# Altium PCB ADS1292R_ECG_Module.PcbDoc
Units mm, origin at the board's own origin, x right, y up, seen from the top; angles counter-clockwise.
Board outline 61 x 33.2 mm, 2 copper layers (Top Layer, Bottom Layer); 73 components, 55 nets, 208 pads, 31 vias.
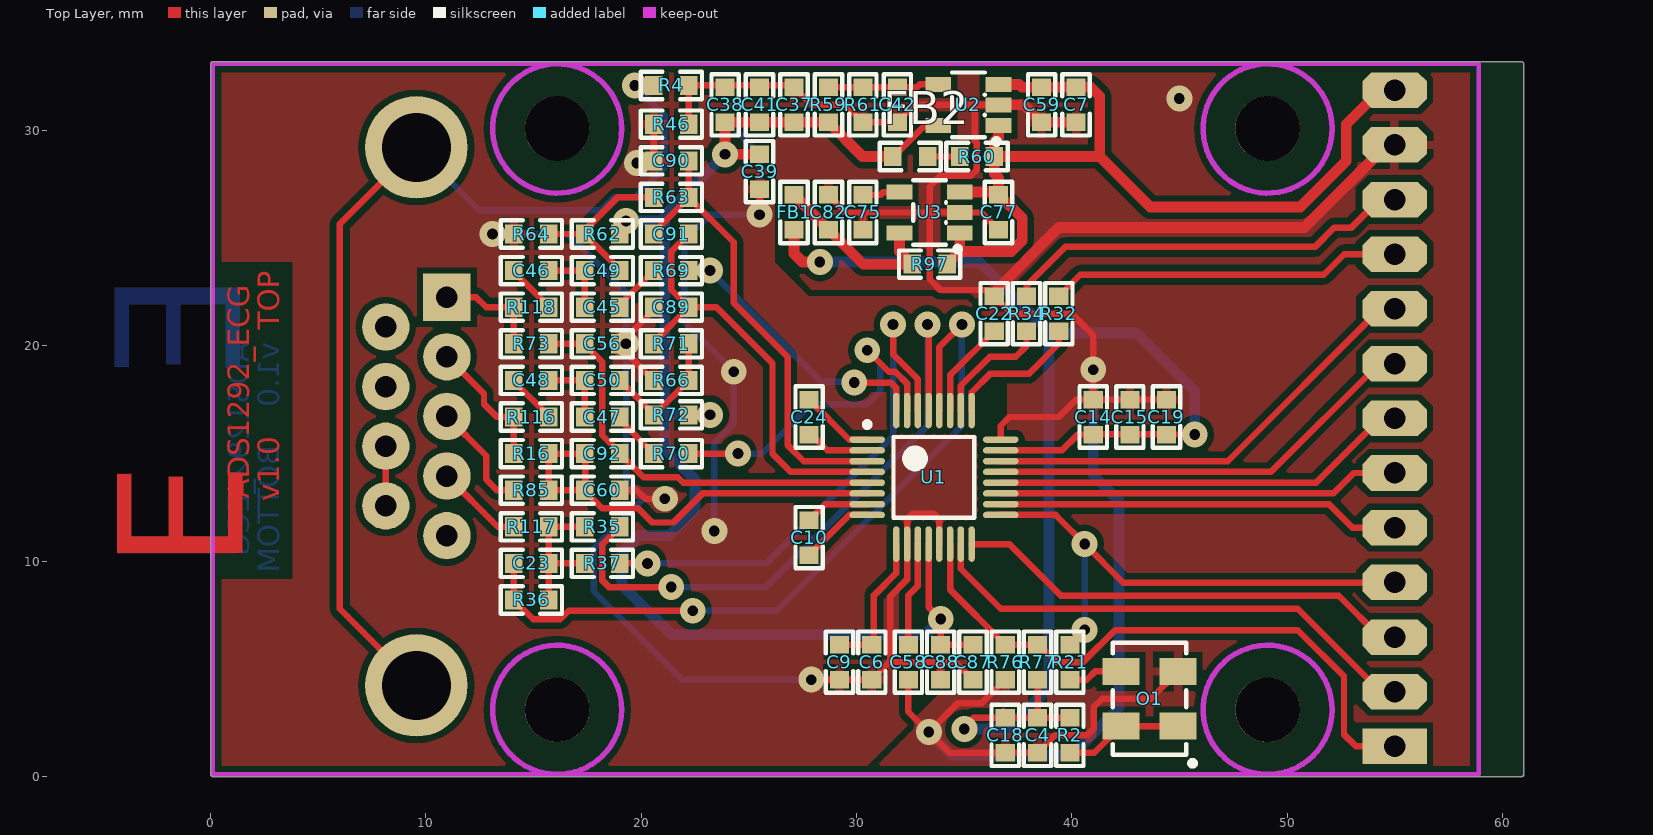
[diagram p0: Top Layer view]
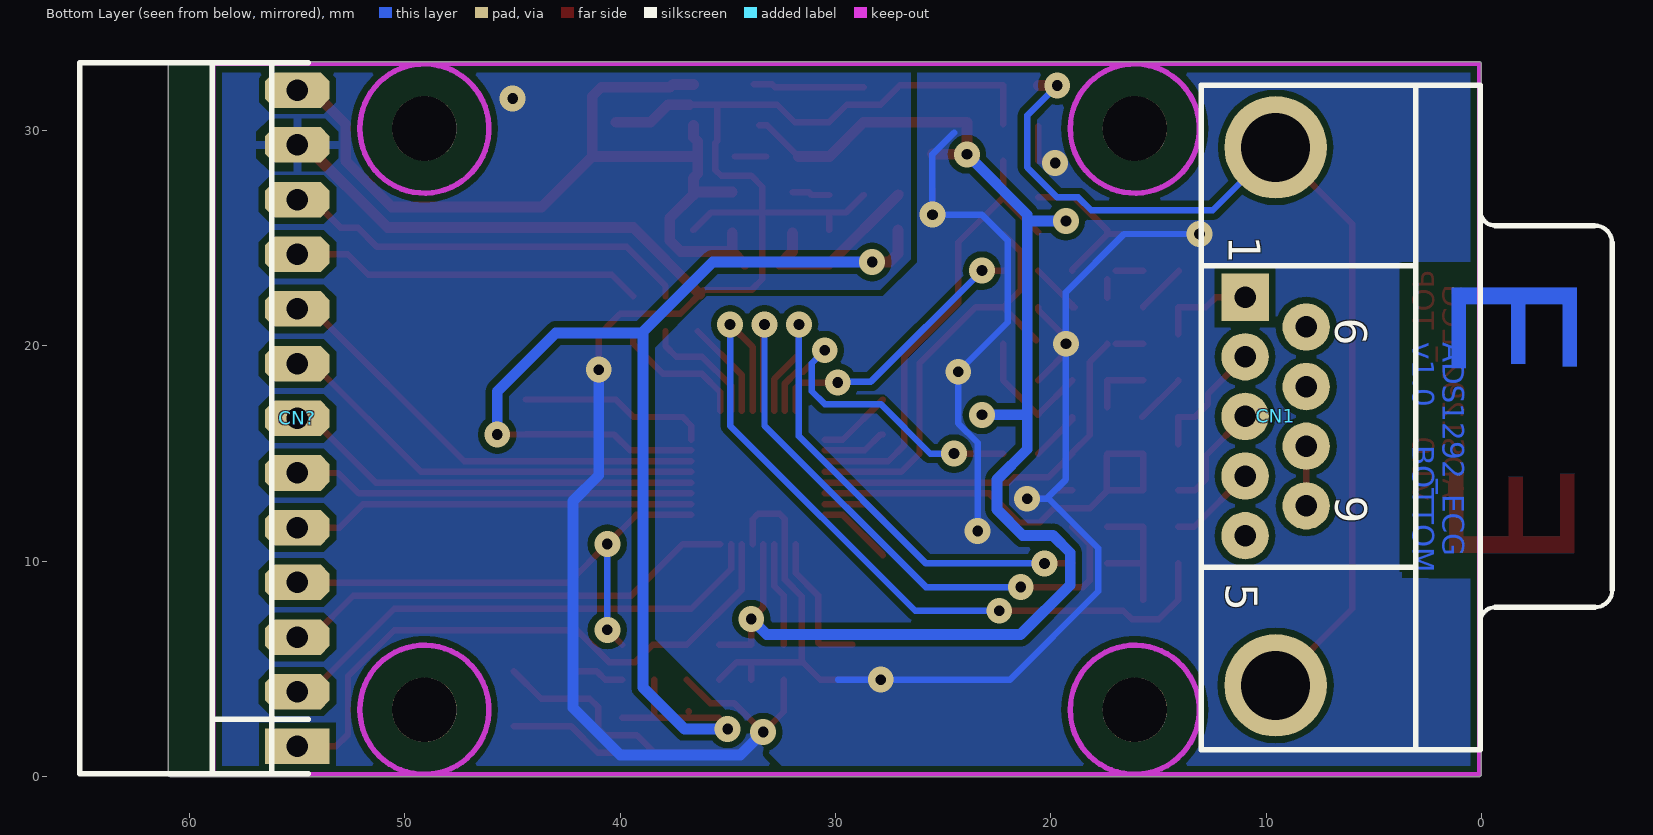
[diagram p1: Bottom Layer view, seen from below]
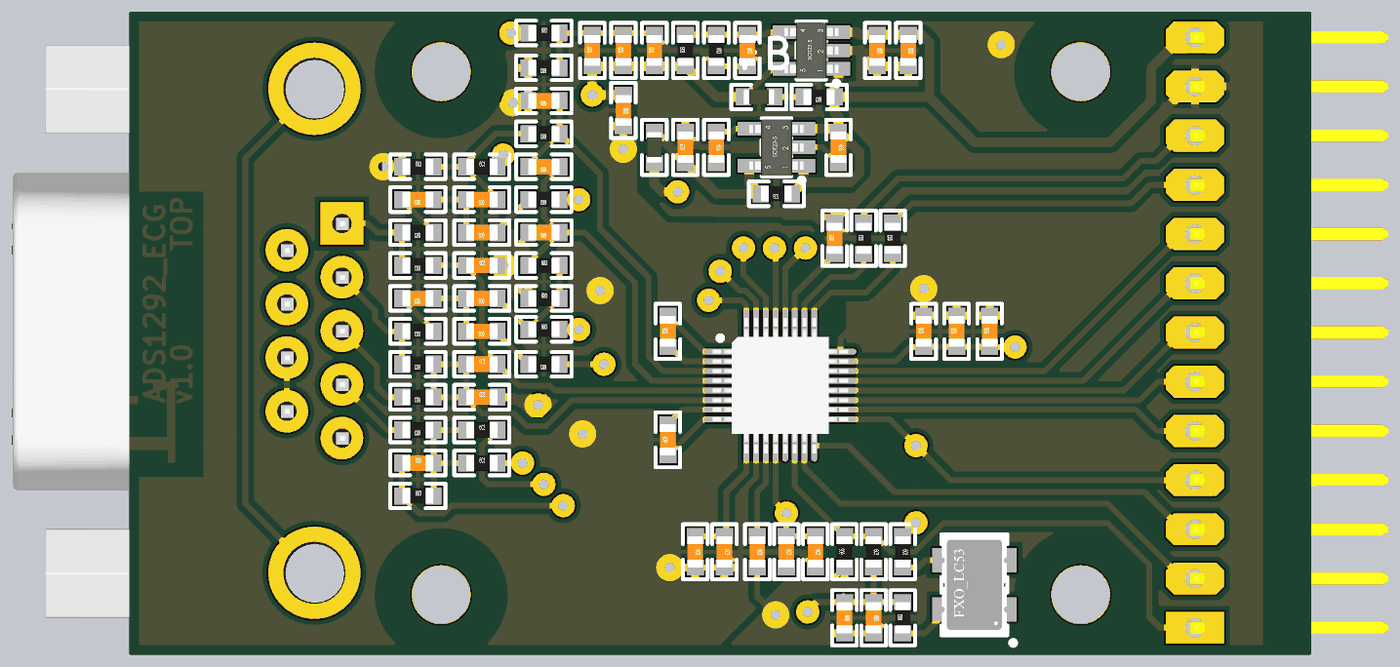
[diagram p2: 3D render of the assembled board from above, using the file's embedded part models]

## Layer stack, top to bottom
Top Solder: solder mask 0.0102, Solder Resist, Dk 3.5
Top Layer: signal copper 0.0356
Dielectric 1: dielectric 0.32, FR-4, Dk 4.8
Bottom Layer: signal copper 0.0356
Bottom Solder: solder mask 0.0102, Solder Resist, Dk 3.5

## Board outline
0.1,0 cw(c0.1,0.1) 0,0.1 0,33.1 cw(c0.1,33.1) 0.1,33.2 60.9,33.2 cw(c60.9,33.1) 61,33.1 61,0.1 cw(c60.9,0.1) 60.9,0

## Design rules (kind name [scope] priority, off if disabled: settings)
Clearance [All] p1: gap=0.3
Clearance Clearance_1 [(InComponent('U2') OR InComponent('U3') OR InComponent('U1'))] p2: gap=0.2
PolygonConnect PolygonConnect_1 [IsVia] p1: connectstyle=Direct reliefconductorwidth=0.4 reliefentries=4 polygonreliefangle="90 Angle" airgapwidth=0.4
PolygonConnect [All] p2: connectstyle=Relief reliefconductorwidth=0.4 reliefentries=4 polygonreliefangle="90 Angle" airgapwidth=0.3
RoomDefinition ADS1292R_ECG_Module [InComponentClass('ADS1292R_ECG_Module')] p1: confinementstyle=ConfineIn formatcopy=TRUE lockcomponents=FALSE outline -8.2,-1.5 67.7,-1.5 67.7,36.2 -8.2,36.2
RoutingVias [All] p1: holewidth=0.5 width=1.2 viastyle="Through Hole" minholewidth=0.5 minwidth=1.2 maxholewidth=0.5 maxwidth=1.2
SilkToSolderMaskClearance [IsPad] p1: minsilkscreentomaskgap=0 clearancetoexposedcopper=TRUE
SolderMaskExpansion [All] p1: expansion=0.102
Width [All] p1: maxlimit=0.5 minlimit=0.3 preferedwidth=0.4
29 further rules are at their usual default settings.

## Components (designator, comment, footprint, x,y, rotation, side; value= is the part's Value field where it differs from the comment)
C4 "---" C0603 38.413,1.913 r270 top
C6 "10uF" C0603 30.713,5.313 r270 top
C7 "10uF" C0603 40.2,31.2 r270 top
C9 "100nF" C0603 29.213,5.313 r270 top
C10 "4,7nF" C0603 27.8,11.1 r90 top
C14 "1uF" C0603 41,16.7 r90 top
C15 "100nF" C0603 42.7,16.7 r90 top
C18 "1uF" C0603 36.913,1.913 r270 top
C19 "100nF" C0603 44.4,16.7 r90 top
C22 "1uF" C0603 36.4,21.502 r90 top
C23 "1,5nF" C0603 14.9,9.9 r0 top
C24 "4,7nF" C0603 27.8,16.7 r90 top
C37 "2,2uF" C0603 27.1,31.2 r90 top
C38 "10uF" C0603 23.9,31.2 r90 top
C39 "100nF" C0603 25.5,28.1 r270 top
C41 "10uF" C0603 25.5,31.2 r90 top
C42 "10nF" C0603 31.9,31.2 r270 top
C45 "2,2nF" C0603 18.2,21.8 r180 top
C46 "100nF" C0603 14.9,23.5 r180 top
C47 "2,2nF" C0603 18.2,16.7 r180 top
C48 "100nF" C0603 14.9,18.4 r180 top
C49 "2,2nF" C0603 18.2,23.5 r180 top
C50 "2,2nF" C0603 18.2,18.4 r180 top
C56 "47pF" C0603 18.2,20.1 r0 top
C58 "1uF" C0603 32.413,5.313 r270 top
C59 "1uF" C0603 38.6,31.2 r270 top
C60 "47pF" C0603 18.2,13.3 r0 top
C75 "10nF" C0603 30.3,26.2 r270 top
C77 "100nF" C0603 36.6,26.2 r270 top
C82 "2,2uF" C0603 28.7,26.2 r90 top
C87 "100nF" C0603 35.413,5.313 r270 top
C88 "1uF" C0603 33.913,5.313 r270 top
C89 "47pF" C0603 21.4,21.8 r180 top
C90 "47pF" C0603 21.4,28.6 r180 top
C91 "---" C0603 21.4,25.2 r180 top
C92 "---" C0603 18.2,15 r0 top
CN1 "Female DB9 Connector" DSUB9H-7,2mm-FEMALE 0.057,16.728 r270 bottom locked
CN? "CN_13x1" GP_13x1H 55,1.4 r90 bottom
FB1 "120R, 2A" FB0603 27.1,26.2 r90 top
FB2 "120R, 2A" FB0603 32.5,28.8 r0 top
O1 "FXO-HC536R-2.048" FXO-HC536R_M 43.613,3.613 r90 top
R2 "---" R0603 39.913,1.913 r90 top
R4 "0R" R0603 21.4,32.1 r0 top
R16 "---" R0603 14.9,15 r180 top
R21 "---" R0603 39.913,5.313 r270 top
R32 "10k" R0603 39.4,21.502 r90 top
R34 "10k" R0603 37.9,21.502 r90 top
R35 "100k" R0603 18.2,11.6 r0 top
R36 "1M" R0603 14.9,8.2 r0 top
R37 "0R" R0603 18.2,9.9 r0 top
R46 "0R" R0603 21.4,30.3 r180 top
R59 "46,4k" R0603 28.7,31.2 r90 top
R60 "0R" R0603 35.6,28.8 r180 top
R61 "30,9k" R0603 30.3,31.2 r270 top
R62 "10M 1%" R0603 18.2,25.2 r0 top
R63 "51k" R0603 21.4,26.9 r180 top
R64 "10M 1%" R0603 14.9,25.2 r0 top
R66 "10M 1%" R0603 21.4,18.4 r0 top
R69 "40k" R0603 21.4,23.5 r180 top
R70 "40k" R0603 21.4,15 r180 top
R71 "51k" R0603 21.4,20.1 r0 top
R72 "10M 1%" R0603 21.4,16.8 r0 top
R73 "51k" R0603 14.9,20.1 r180 top
R76 "---" R0603 36.913,5.313 r90 top
R77 "10k" R0603 38.413,5.313 r270 top
R85 "51k" R0603 14.9,13.3 r180 top
R97 "0R" R0603 33.4,23.8 r180 top
R116 "0R" R0603 14.9,16.7 r180 top
R117 "100k" R0603 14.9,11.6 r180 top
R118 "0R" R0603 14.9,21.8 r180 top
U1 "ADS1292R" TSQFP50P700X700X105-32N 33.6,13.9 r0 top
U2 "TPS73201DBVT" SOT-23-5 35.2,31.2 r90 top
U3 "TPS73033DBVT" SOT-23-5 33.4,26.2 r90 top

## Footprints (in the part's own frame and the unit in brackets; to place one, negate y for a bottom-side part, rotate by r counter-clockwise, add the part's x,y. Pads: shape width x height; smd on the part's side, far side on the other; paste and mask are expansions set on the pad)
C0603 [mil]
  rect 32x35 smd: 1(32,0) 2(-32,0)
  silkscreen extent -56,-25 56,25, body extent -31,-16 32,16, height 12
DSUB9H-7,2mm-FEMALE [mm]
  rect 2.2x2.2 hole 1: 1(-5.54,-10.92)
  round 2.2 hole 1: 2(-2.77,-10.92) 3(0,-10.92) 4(2.77,-10.92) 5(5.54,-10.92) 6(-4.155,-8.08) 7(-1.385,-8.08) 8(1.385,-8.08) 9(4.155,-8.08)
  round 4.76 hole 3.2: 10(-12.495,-9.5) 11(12.495,-9.5)
  silkscreen extent -15.39,-12.95 15.49,6.14, body extent -15.38,-12.98 15.43,6.1, height 12.61
FB0603 [mil]
  rect 32x35 smd: 1(32,0) 2(-32,0)
  silkscreen extent -56,-25 56,25, body extent -31,-16 32,16, height 35
FXO-HC536R_M [mm] "Fox Electronics HCMOS, CERAMIC, SMD, OSCILLATOR"
  rect 1.24x1.7 smd: 1(-1.27,-1.325) 2(1.27,-1.325) 3(1.27,1.325) 4(-1.27,1.325)
  silkscreen extent -3.12,-2.13 2.6,1.7, body extent -2.57,-1.67 2.58,1.68, height 1.39
GP_13x1H [mm]
  rect 1.651x3 hole 1: 1(0,0)
  oct 1.651x3 hole 1: 2(2.54,0) 3(5.08,0) 4(7.62,0) 5(10.16,0) 6(12.7,0) 7(15.24,0) 8(17.78,0) 9(20.32,0) 10(22.86,0) 11(25.4,0) 12(27.94,0) 13(30.48,0)
  silkscreen extent -1.27,-0.5 31.75,10.1, body extent -1.27,-0.25 31.75,9.97, height 3.05
R0603 [mil]
  rect 32x35 smd: 1(32,0) 2(-32,0)
  silkscreen extent -56,-25 56,25, body extent -31,-16 32,16, height 12
SOT-23-5 [mm] ", AKA: SOT753 (NXP), TSOP5 (NXP)"
  rect 0.7x1.2 smd: 1(-0.95,-1.4) 2(0,-1.4) 3(0.95,-1.4) 4(0.95,1.4) 5(-0.95,1.4)
  silkscreen extent -1.82,-1.43 1.5,0.76, body extent -1.45,-1.4 1.45,1.4, height 1.14
TSQFP50P700X700X105-32N [mm] "TSQFP, 32-Leads, Body 5,00x5,00mm, Pitch 0,50mm, IPC Medium Density"
  oval 1.65x0.3 smd: 1(-3.1,1.75) 2(-3.1,1.25) 3(-3.1,0.75) 4(-3.1,0.25) 5(-3.1,-0.25) 6(-3.1,-0.75) 7(-3.1,-1.25) 8(-3.1,-1.75) 17(3.1,-1.75) 18(3.1,-1.25) 19(3.1,-0.75) 20(3.1,-0.25) 21(3.1,0.25) 22(3.1,0.75) 23(3.1,1.25) 24(3.1,1.75)
  oval 0.3x1.65 smd: 9(-1.75,-3.1) 10(-1.25,-3.1) 11(-0.75,-3.1) 12(-0.25,-3.1) 13(0.25,-3.1) 14(0.75,-3.1) 15(1.25,-3.1) 16(1.75,-3.1) 25(1.75,3.1) 26(1.25,3.1) 27(0.75,3.1) 28(0.25,3.1) 29(-0.25,3.1) 30(-0.75,3.1) 31(-1.25,3.1) 32(-1.75,3.1)
  silkscreen extent -3.22,-1.88 1.88,2.57, body extent -3.5,-3.5 3.5,3.5, height 1.2

## Part data
C4 C6 C7 C9 C10 C14 C15 C18 C19 C22 C23 C24 C37 C38 C39 C41 C42 C45 C46 C47 C48 C49 C50 C56 C58 C59 C60 C75 C77 C82 C87 C88 C89 C90 C91 C92: library part Cap, "Capacitor"
CN1: library part DB9F_WGND
FB1 FB2: library part BLM18PG121SN1D, "Ferrite Bead; Imp.@ 100MHz:120R; Mounting: SMD; 2A; Case: 0603"
O1: "Fox Electronics, 2.048MHZ, 3.2x5mm, SMD Oscillator"
R2 R4 R16 R21 R32 R34 R35 R36 R37 R46 R59 R60 R61 R62 R63 R64 R66 R69 R70 R71 R72 R73 R76 R77 R85 R97 R116 R117 R118: library part Res, "Resistor"
U1: "Low-Power, 2-Channel, 24-Bit Analog Front-End for Biopotential Measurements"
U2: "Single Output LDO, 250mA, Adj.(1.2 to 5.5V), Low Noise, Fast Transient Response"
U3: "Single Output LDO, 3V3@250mA, Low Noise, High PSSR"

## Free pads (board coordinates)
  round 3 hole 3: 0(16.1,3.1) 0(16.1,30.1) 0(49.1,3.1) 0(49.1,30.1)

## Via types
v1: diameter 1.2, hole 0.5, Top Layer to Bottom Layer, 31 vias

## Nets (pads, with @x,y where several pads share a name; then routed paths per layer and width w, separated by ;. In a path a pad name is that pad's centre, name@x,y a point inside that pad or via, vN(x,y) a via of type N, cw(c..) or ccw(c..) an arc to the next point about the centre after c; other vN are vias at no path point)
ADC_CLK: CN?.4 R21.2 U1.17 | length 24.6
  Top Layer w0.3: U1.17 39.25,12.15 39.4,12 v1(40.6,10.8) 42.4,9 54.98,9 CN?.4 ; R21.2 v1(40.6,6.813)
  Bottom Layer w0.3: v1(40.6,6.813) v1(40.6,10.8)
ADC_CS: CN?.5 U1.18 | length 18.8
  Top Layer w0.3: U1.18 51.95,12.65 53.04,11.56 CN?.5
ADC_DIN: CN?.6 U1.19 | length 18.7
  Top Layer w0.3: U1.19 52.15,13.15 53.1,14.1 CN?.6
ADC_DOUT: CN?.8 U1.21 | length 21.2
  Top Layer w0.3: U1.21 49.25,14.15 54.28,19.18 CN?.8 ; CN?.8@54.42,19.2 CN?.8@55,19.78
ADC_DRDY: CN?.9 U1.22 | length 21.2
  Top Layer w0.3: U1.22 47.25,14.65 54.32,21.72 CN?.9
ADC_GPIO1: CN?.11 R34.1 | length 19.2
  Top Layer w0.3: R34.1 37.9,22.802 39.699,24.601 51.299,24.601 ; 51.3,24.6 52.2,25.5 53,25.5 54.3,26.8 CN?.11
ADC_GPIO2: CN?.10 R32.1 | length 16.4
  Top Layer w0.3: R32.1 40.398,23.313 51.713,23.313 52.66,24.26 CN?.10
ADC_RESET: CN?.2 U1.15 | length 23.7
  Top Layer w0.3: U1.15 34.85,9.65 36.7,7.8 50.5,7.8 54.36,3.94 CN?.2
ADC_SCLK: CN?.7 U1.20 | length 20.3
  Top Layer w0.3: U1.20 51.35,13.65 54.34,16.64 CN?.7 ; CN?.7@54.46,16.7 CN?.7@55,17.24
ADC_START: CN?.3 U1.16 | length 21.4
  Top Layer w0.3: U1.16 37.1,10.8 39.5,8.4 52.4,8.4 54.32,6.48 CN?.3
ADS_AVDD: C37.2 C38.2 C39.2 C41.2 C87.2 C88.2 FB2.2 R59.2 R62.1 R72.1 U1.12 U2.5 | length 64.3
  Top Layer w0.3: FB2.2@31.735,28.8 33.185,30.25 U2.5@33.55,30.25 ; U1.12 33.35,7.876 v1(33.913,7.313) C88.2 C87.2
  Top Layer w0.5: C39.2 25.487,28.9 v1(23.9,28.9) C38.2 C41.2 C37.2 R59.2 30.287,28.8 FB2.2 FB2.2@31.735,28.8
  Bottom Layer w0.3: 19.9,11.2 20.039,11.2
  Bottom Layer w0.5: v1(19.3,25.8) 21.1,25.8 ; 19.9,11.2 19.1,10.4 19.1,8.9 21.404,6.596 33.196,6.596 v1(33.913,7.313) ; 20.039,11.2 21.3,11.2 22.5,12.4 22.5,13.8 21.1,15.2 21.1,16.8 ; v1(23.2,16.8) 21.1,16.8 ; v1(23.9,28.9) 21.1,26.1 21.1,16.8
ADS_CLK_SCL: CN?.1 R76.1 R77.2 U1.14 | length 28.8
  Top Layer w0.3: U1.14 34.35,8.688 R76.1 R77.2 38.491,6.126 39.301,5.315 40.525,5.315 42.009,6.8 50.5,6.8 52.648,4.652 52.648,1.952 53.2,1.4 54.4,1.4 CN?.1@55,2
ADS_DVDD: C4.2 C14.2 C15.2 C18.2 C19.2 FB1.2 R2.1 R77.1 U1.23 | length 61.2
  Top Layer w0.3: 35.426,2.726 C18.2 C4.2 ; U1.23 39.55,15.15 40.287,15.887 C14.2 ; C18.2@36.813,3.013 C18.2@36.826,3.026 ; R77.1 C4.2 ; R2.1 C4.2 ; C14.2@41,15.9 44.387,15.9 C19.2 v1(45.713,15.887)
  Top Layer w0.5: FB1.2 27.1,24.3 27.5,23.9 v1(28.3,23.9)
  Bottom Layer w0.5: v1(28.3,23.9) 35.7,23.9 39,20.6 ; v1(35.013,2.213) 37.013,2.213 38.941,4.141 38.941,20.541 39,20.6 ; v1(45.713,15.887) 45.713,17.887 43,20.6 39,20.6
AVSS: C6.1 C9.1 C39.1 C56.1 C60.1 C87.1 C88.1 C89.1 C90.1 R46.1 R64.2 R66.2 U1.10 U1.13 | length 91.5
  Top Layer w0.3: v1(13.1,25.2) R64.2 ; C60.1 19.8,13.3 20.2,12.9 v1(21.1,12.9) ; C56.1@19.013,20.226 C56.1 19.013,19.974 R66.2 ; C56.1@19.206,20.294 20.587,21.674 C89.1 ; v1(19.8,28.5) 19.9,28.6 C90.1 R46.1@20.587,30.2 ; v1(25.5,26.1) C39.1 ; v1(27.9,4.5) C9.1 C6.1 31.526,5.313 33.913,5.313 ; 31.513,5.313 31.564,5.364 31.564,8.364 32.35,9.15 U1.10 32.35,11.95 32.6,12.2 33.6,12.2 33.85,11.95 U1.13 ; C88.1 33.913,5.313 ; C87.1 34.6,5.313 33.913,5.313
  Bottom Layer w0.3: v1(13.1,25.2) 16.6,25.2 19.3,22.5 19.3,13.8 20.2,12.9 v1(21.1,12.9) 20.1,12.9 17.8,10.6 17.8,8.6 21.913,4.487 29.887,4.487 ; v1(23.4,11.4) 23.4,15.5 24.3,16.4 v1(24.3,18.8) 22,21.1 22,24.9 23.2,26.1 v1(25.5,26.1) 25.5,28.9 24.496,29.904
  other v1: 19.3,20.1
EARTH: CN1.10 CN1.11 R4.2 | length 46.8
  Top Layer w0.3: CN1.11 6,7.79 6,25.666 CN1.10
  Top Layer w0.5: v1(19.7,32.1) R4.2
  Bottom Layer w0.3: CN1.10 12.48,26.3 18.123,26.3 18.723,26.9 19.7,26.9 21.092,28.292 21.092,30.708 v1(19.7,32.1)
GND: C4.1 C7.1 C14.1 C15.1 C18.1 C19.1 C22.1 C37.1 C38.1 C41.1 C42.1 C58.1 C59.1 C75.1 C77.1 C82.1 CN?.12 O1.2 R4.1 R46.2 R61.1 R76.2 U1.24 U2.2 U3.2 | length 130.3
  Top Layer w0.3: R46.2 R4.1 C37.1@27.013,32.1 ; C37.1 27.91,31.202 29.485,31.202 R61.1 C42.1 32.713,31.2 35.5,31.2 ; C82.1 29.513,26.2 30.3,26.2 ; C75.1 30.3,26.2 ; C58.1 32.413,3.013 v1(33.363,2.063) ; C77.1 35.787,26.2 U3.2 33.4,26.2 ; U1.24 36.7,16.3 37.1,16.7 39.4,16.7 40.213,17.513 C14.1 ; U2.2@36.8,31.2 U2.2 35.5,31.2 ; R76.2 35.826,3.413 34.713,3.413 v1(33.363,2.063) ; C19.1 C15.1 C14.1 ; O1.2 43.668,3.613 41.413,3.613 41.013,3.213 41.013,2.213 40.713,1.913 39.226,1.913 C4.1 C18.1 34.326,1.1 v1(33.363,2.063) ; 30.3,26.2 33.4,26.2 ; 33.4,26.2 33.4,23.1 33.9,22.6 36.115,22.6 37.215,21.5 40.012,21.5 40.249,21.263 40.249,21.254 41,20.502 v1(41,18.9) C14.1 ; 33.4,26.2 33.4,27.4 33.904,27.904 35.313,27.904 35.598,28.188 35.598,29.412 35.5,29.509 35.5,31.2
  Top Layer w0.5: C22.1@36.308,22.408 39.4,25.5 50.8,25.5 54.64,29.34 CN?.12 ; U2.2@36.8,31.2 37.787,31.2 C59.1 C7.1
  Bottom Layer w0.5: v1(33.363,2.063) 34.426,1 40,1 42.2,3.2 42.2,12.8 41,14 v1(41,18.9)
  other v1: 45,31.5
LA: CN1.2 R16.1 R116.1 | length 5.8
  Top Layer w0.3: CN1.2 12.7,17.775 12.7,17.3 13.3,16.7 R116.1 14.087,15.445
LL: CN1.3 R85.1 | length 5.2
  Top Layer w0.3: CN1.3 12.8,14.905 12.8,13.8 13.3,13.3 R85.1
NetC6_2: C6.2 C9.2 U1.9 | length 6.6
  Top Layer w0.3: C9.2 C6.2 30.813,6.226 30.813,8.413 31.85,9.45 U1.9
NetC10_1: C10.1 U1.7 | length 3
  Top Layer w0.3: C10.1@27.813,11.9 C10.1 28.537,12.65 U1.7
NetC10_2: C10.2 U1.8 | length 3.5
  Top Layer w0.3: C10.2 29.663,12.15 U1.8
NetC22_2: C22.2 U1.27 | length 4.5
  Top Layer w0.3: U1.27 34.35,18.64 C22.2
NetC23_1: C23.1 R35.2 R36.1 R37.2 R117.2 | length 6.7
  Top Layer w0.3: R36.1 C23.1 ; R37.2 C23.1 ; R35.2 R117.2 C23.1
NetC23_2: C23.2 R36.2 U1.28 | length 35.6
  Top Layer w0.3: C23.2 R36.2 14.987,7.3 16.235,7.3 16.635,7.7 v1(22.4,7.7) ; U1.28 33.85,19.95 v1(34.9,21)
  Bottom Layer w0.3: v1(22.4,7.7) 26.3,7.7 34.9,16.3 v1@34.9,20.9
NetC24_1: C24.1 U1.1 | length 3.5
  Top Layer w0.3: C24.1 29.663,15.65 U1.1
NetC24_2: C24.2 U1.2 | length 3
  Top Layer w0.3: C24.2 27.913,15.887 28.65,15.15 U1.2
NetC42_2: C42.2 R59.1 R61.2 U2.4 | length 5.2
  Top Layer w0.3: R59.1 R61.2 C42.2 32.813,32.013 32.95,32.15 U2.4
NetC45_1: C45.1 C46.2 C49.1 | length 2.1
  Top Layer w0.3: C46.2 C49.1@16.981,23.5 ; 17.387,22.244 C49.1@17.387,23.094
NetC45_2: C45.2 R69.1 | length 2.7
  Top Layer w0.3: C45.2@19.013,21.926 C45.2 18.887,21.8 R69.1
NetC46_1: C46.1 R118.2 | length 2.4
  Top Layer w0.3: C46.1@14.051,23.5 15.713,21.838 R118.2
NetC47_1: C47.1 C48.2 C50.1 | length 2.9
  Top Layer w0.3: C48.2 C50.1 17.387,17.144
NetC47_2: C47.2 R70.1 | length 2.4
  Top Layer w0.3: C47.2 19.013,16.574 R70.1
NetC48_1: C48.1 R116.2 | length 2.4
  Top Layer w0.3: C48.1 14.087,18.362 R116.2@15.749,16.7
NetC49_2: C49.2 R62.2 R63.1 R64.1 | length 8.1
  Top Layer w0.3: R64.1 R62.2 ; C49.2 19.013,23.538 17.387,25.164 R62.2 ; R63.1 18.9,26.9 17.387,25.387 R62.2
NetC50_2: C50.2 R66.1 R71.1 R72.2 | length 6.3
  Top Layer w0.3: C50.2 20.587,16.826 R72.2@20.638,16.826 ; R72.2 20.613,16.8 R66.1 R71.1
NetC56_2: C56.2 C92.1 R73.2 U1.5 | length 19.2
  Top Layer w0.3: R73.2 C56.2@16.981,20.1 ; C56.2 17.387,20.062 18.198,19.252 18.198,15.853 19.013,15.038 C92.1 20.113,13.9 20.8,13.9 ; 20.684,13.904 21.696,13.904 21.95,13.65 U1.5
NetC58_2: C58.2 U1.11 | length 4.9
  Top Layer w0.3: C58.2 32.413,8.413 32.85,8.85 U1.11
NetC60_2: C60.2 C92.2 R16.2 R85.2 U1.6 | length 21
  Top Layer w0.3: C92.2 R16.2 R85.2 C60.2 ; C92.2@17.4,14.9 17.4,13.313 C60.2 ; U1.6 22.85,13.15 21.5,11.8 20.517,11.8 19.865,12.452 18.198,12.452 17.387,13.262 C60.2
NetC75_2: C75.2 U3.4 | length 1.8
  Top Layer w0.3: C75.2 31.113,27.013 31.25,27.15 U3.4
NetC89_2: C89.2 C91.2 R71.2 U1.4 | length 20.1
  Top Layer w0.3: R71.2@20.687,20.274 C89.2 ; C91.2 21.4,24.387 21.4,22.613 C89.2 ; U1.4 26.95,14.15 26.1,15 26.1,19.2 23.5,21.8 C89.2
NetC90_2: C90.2 C91.1 R63.2 U1.3 | length 21.4
  Top Layer w0.3: C91.1@20.587,25.274 R63.2 ; C90.2 R63.2 ; U1.3 27.55,14.65 26.8,15.4 26.8,19.5 24.3,22 24.3,24.813 R63.2
NetCN1_8: CN1.8 CN1.9 | length 2.8
  Top Layer w0.3: CN1.9 CN1.8
NetFB2_1: FB2.1 R60.1 | length 1.5
  Top Layer w0.3: FB2.1@33.213,28.8 R60.1@34.687,28.8
NetO1_1: O1.1 O1.4 R2.2 | length 5.5
  Top Layer w0.3: R2.2 41.045,1.1 O1.4 O1.1
NetO1_3: O1.3 R21.1 | length 2.5
  Top Layer w0.3: R21.1 40.7,4.5 41.083,4.883 O1.3
NetR32_2: R32.2 U1.25 | length 6.4
  Top Layer w0.3: U1.25 35.35,17.85 36.2,18.7 37.998,18.7 39.4,20.102 R32.2
NetR34_2: R34.2 U1.26 | length 5.7
  Top Layer w0.3: U1.26 34.85,18.15 36.2,19.5 37.398,19.5 37.9,20.002 R34.2
NetR35_1: R35.1 U1.29 | length 29.9
  Top Layer w0.3: R35.1 18.202,10.79 18.202,9.102 18.505,8.8 v1(21.4,8.8) ; v1(33.3,21) 33.35,20.95 U1.29
  Bottom Layer w0.3: v1(21.4,8.8) 25.8,8.8 33.3,16.3 v1(33.3,21)
NetR37_1: R37.1 U1.30 | length 24.8
  Top Layer w0.3: R37.1 v1(20.3,9.9) ; v1(31.7,21) 31.7,19.614 32.85,18.464 U1.30
  Bottom Layer w0.3: v1(20.3,9.9) 25.8,9.9 31.7,15.8 31.7,20.9 v1@31.8,21
NetR69_2: R69.2 U1.32 | length 13.1
  Top Layer w0.3: R69.2 v1(23.2,23.5) ; v1(29.9,18.3) 31.6,18.3 31.85,18.05 U1.32
  Bottom Layer w0.3: v1(23.2,23.5) 28.355,18.345 v1@30.1,18.345
NetR70_2: R70.2 U1.31 | length 16
  Top Layer w0.3: R70.2 v1(24.5,15) ; v1(30.5,19.8) 31.5,18.8 31.807,18.8 32.35,18.257 U1.31
  Bottom Layer w0.3: v1(24.5,15) 25.6,15 27.9,17.3 30.5,17.3 31.1,17.9 31.1,19.2 v1(30.5,19.8)
RA: CN1.1 R73.1 R118.1 | length 4.6
  Top Layer w0.3: CN1.1 12.332,22.268 12.8,21.8 R118.1 14.087,20.545
RL: CN1.4 R117.1 | length 4.1
  Top Layer w0.3: CN1.4 13.335,11.6 R117.1
VCC_3V3: C82.2 FB1.1 R97.1 U3.5 | length 8.6
  Top Layer w0.3: FB1.1@27,27.1 27,27.087 FB1.1@27.087,27
  Top Layer w0.5: FB1.1 30.313,23.8 R97.1 32,24.387 U3.5
VIN: C7.2 C59.2 C77.2 CN?.13 R60.2 R97.2 U2.1 U2.3 U3.1 U3.3 | length 43.2
  Top Layer w0.5: R97.2 34.8,24.387 ; U3.1 34.8,24.387 ; U3.3 36.463,27.15 C77.2 ; R60.2 41.3,28.8 ; U2.1 36.6,29.7 36.4,29.5 36.4,28 36.6,27.8 C77.2 ; U2.3 37.55,32.15 37.687,32.013 C59.2 40.887,32.013 41.3,31.6 41.3,28.8 ; CN?.13 54.329,31.88 52.749,30.3 52.749,28.589 50.611,26.451 43.649,26.451 41.3,28.8 ; 34.8,24.387 37.187,24.387 37.7,24.9 37.7,25.938 36.626,27.013 C77.2
pads on no net: CN1.5 CN1.6 CN1.7

## Polygon pours and split planes (outlines as drawn)
GND on Bottom Layer "Top Layer-No Net" (solid, remove dead copper, pour order 7): 32,0 39,7 39,19.3 36,22.3 27.8,22.3 26.2,23.9 26.2,33.2 26.209,33.209 60.8,33.2 60.9,33.1 60.9,0.1 60.8,0
AVSS on Bottom Layer "Top Layer-No Net" (solid, remove dead copper, pour order 5): 0.023,0.023 0.046,0 32,0 39,7 39,17.1 39,19.3 36.3,22 36,22.3 30.6,22.3 28.1,22.3 27.8,22.3 26.2,23.9 26.2,28 26.2,33.2 0.1,33.2 0.092,33.2 -0.009,33.1
AVSS on Top Layer "Top Layer-No Net" (solid, remove dead copper, pour order 6): 0.023,0.023 0.046,0 30,0 37,7 37,20.3 35,22.3 27.785,22.315 26.2,23.9 26.2,33.2 0.092,33.2 -0.009,33.1
GND on Top Layer "Top Layer-No Net" (solid, remove dead copper, pour order 8): 30,0 37,7 37,20.3 35,22.3 27.8,22.3 26.2,23.9 26.2,33.2 26.209,33.209 58.8,33.2 58.9,33.1 58.9,0.1 58.8,0

## Keep-outs
Keep-Out Layer:
  circle w0.254: c16.1,3.1 r3
  circle w0.254: c49.1,30.1 r3
  circle w0.254: c49.1,3.1 r3
  circle w0.254: c16.1,30.1 r3
  circle w0.254: c16.1,30.1 r3
  circle w0.254: c16.1,3.1 r3
  lines w0.2: 0.1,0.1 58.9,0.1 58.9,33.1 0.1,33.1 0.1,0.1

## Other copper
Top Layer:
  pour cut-out: 3.819,9.5 3.819,23.908 0.5,23.908 0.5,9.5
  text "TOP" at 3.192,20.742 h1 r90
  text "ADS1292_ECG" at 1.792,12.892 h1 r90
  text "v1.0" at 3.192,12.792 h1 r90
  text "E" at 3.392,9.592 h10 r90
Bottom Layer:
  pour cut-out: 3.819,9.492 3.819,23.9 0.5,23.9 0.5,9.492
  text "E" at 3.292,23.484 h10 r90
  text "ADS1292_ECG" at 1.792,20.184 h1 r90
  text "v1.0" at 3.192,20.184 h1 r90
  text "BOTTOM" at 3.192,15.384 h1 r90

## Silkscreen, mask and mechanical layers (free items; w line width, h text height)
Mechanical 3:
  lines w0.2: 0.1,0.1 0.1,33.1 ; 0.1,0.1 58.9,0.1 58.9,33.1 ; 0.1,0.1 0.1,33.1 ; 0.1,33.1 58.9,33.1 ; 0.1,33.1 58.9,33.1

## Dimensions
60.9,33.2 to 0.1,0 on Mechanical 2
0.1,33.2 to 58.9,32.9 on Mechanical 2

## Text inside footprints (layer, text, board x,y; h text height)
CN1: Bottom Overlay "6" at 6.788,21.3 h1.5 r90; Bottom Overlay "9" at 6.788,13.045 h1.5 r90; Bottom Overlay "5" at 11.868,8.981 h1.5 r90; Bottom Overlay "1" at 11.741,25.11 h1.5 r90